# EAGLE board BlinkyBall (EAGLE 6.2)
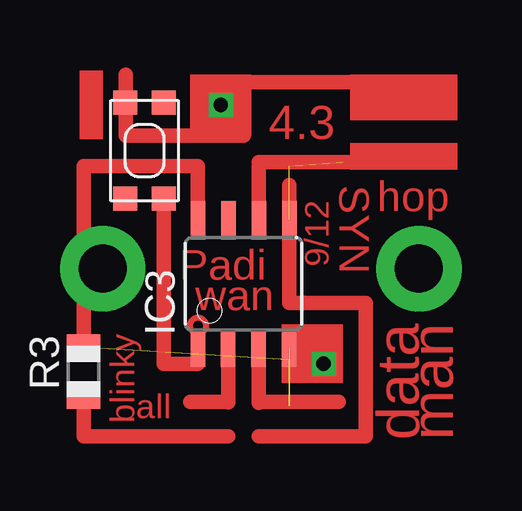
[diagram p0: board, top side]

No outline drawn. Coordinates in mm, seen from the top.
Copper layers (1*16): Top 0.035mm / dielectric 1.5mm / Bottom 0.035mm
Design rules: minimum track width 10mil, minimum drill 24mil, track to track 8mil, track to pad 8mil, pad to pad 8mil, via to via 8mil, smd to smd 8mil, copper to edge 40mil, drill to drill 8mil, minimum pad ring 10mil, minimum via ring 8mil, stop-mask expansion 4mil, vias tented up to drill 0mil, thermal gap 10mil

## Footprints (pad centres in the part's own frame; a part is rotated, then mirrored left to right if it is on the bottom)
KMR2 = smd 1 x 1: 1 2,0.8; 2 2,-0.8; 3 -2,0.8; 4 -2,-0.8
8S1 = smd 0.6 x 1.6: 1 -1.905,-2.654; 2 -0.645,-2.654; 3 0.625,-2.654; 4 1.895,-2.654; 5 1.905,2.654; 6 0.635,2.654; 7 -0.635,2.654; 8 -1.905,2.654
R0805 = smd 1.1 x 1.4: 1 -1,0; 2 1,0

## Placement (x,y rotation side)
E$2  [KMR2]  5.87,14.92 90 top
IC3  TINY13-20SSU  [8S1]  10,9.37 0 top
R3  [R0805]  3.33,5.71 90 top

## Library data of the parts
E$2 R3 = adafruit
IC3 = atmel; MPN: ATTINY13-20SSU; OC_FARNELL: 1455133; OC_NEWARK: 58M3771

## Nets
N$25: IC3.5
N$26: IC3.2
N$27: IC3.3
N$28: R3.1
N$30: IC3.4 R3.2

## Tracks (layer width: path | path; a pad name or v marks a point on that pad's centre or on a via)
N$25  (2 unrouted)
N$26
  Top 0.61: IC3.2 9.37,5.56 9.36,4.43
N$27
  Top 0.406: IC3.3 10.63,6.61
  Top 0.61: 10.63,6.61 10.64,4.4
N$28
  Top 0.61: 9.37,3.02 3.33,3.02 R3.1
N$30  (3 unrouted)
  Top 0.406: IC3.4 11.9,6.83
  Top 0.61: 11.9,6.83 11.91,6.83 11.91,5.59
S$1
  Top 0.61: 10,15.56 5.08,15.56 5.08,18.1
S$2
  Top 0.61: 10.64,4.45 13.97,4.45 | 9.37,17.78 14.76,17.78
S$3  (via drill 2 pad 3.56)
  other vias: 17.3,10 4.13,10
S$4
  Top 0.61: 3.33,11.43 3.33,14.29 8.1,14.29 8.1,13.81 8.1,12.7 8.1,11.91
S$5
  Top 0.61: 10.64,14.45 14.92,14.45
S$6
  Top 0.61: 10.64,3.02 12.06,3.02
S$7
  Top 0.61: 6.67,12.86 6.67,6.03 8.1,6.03
S$8
  Top 0.61: 9.21,4.45 7.78,4.45
S$9  (via drill 0.6)
  other vias: 9.05,16.83
S$10
  Top 0.61: 3.33,6.83 3.33,8.57
S$11
  Top 0.61: 11.91,13.49 11.91,8.57 15.08,8.57 15.08,3.02 10.64,3.02
S$12
  Top 0.61: 10.64,12.38 10.64,14.29
S$14  (via drill 0.6)
  other vias: 13.34,6.03
(copper drawn outside any net)
  shapes: Top area x5, Top circle x1

## Text on the board
Top: 4.3 | 9/12 | SYN | hop | Padi | wan | blinky | all | data | man